# EAGLE board MurataMicroSD_P (EAGLE 6.5.0)
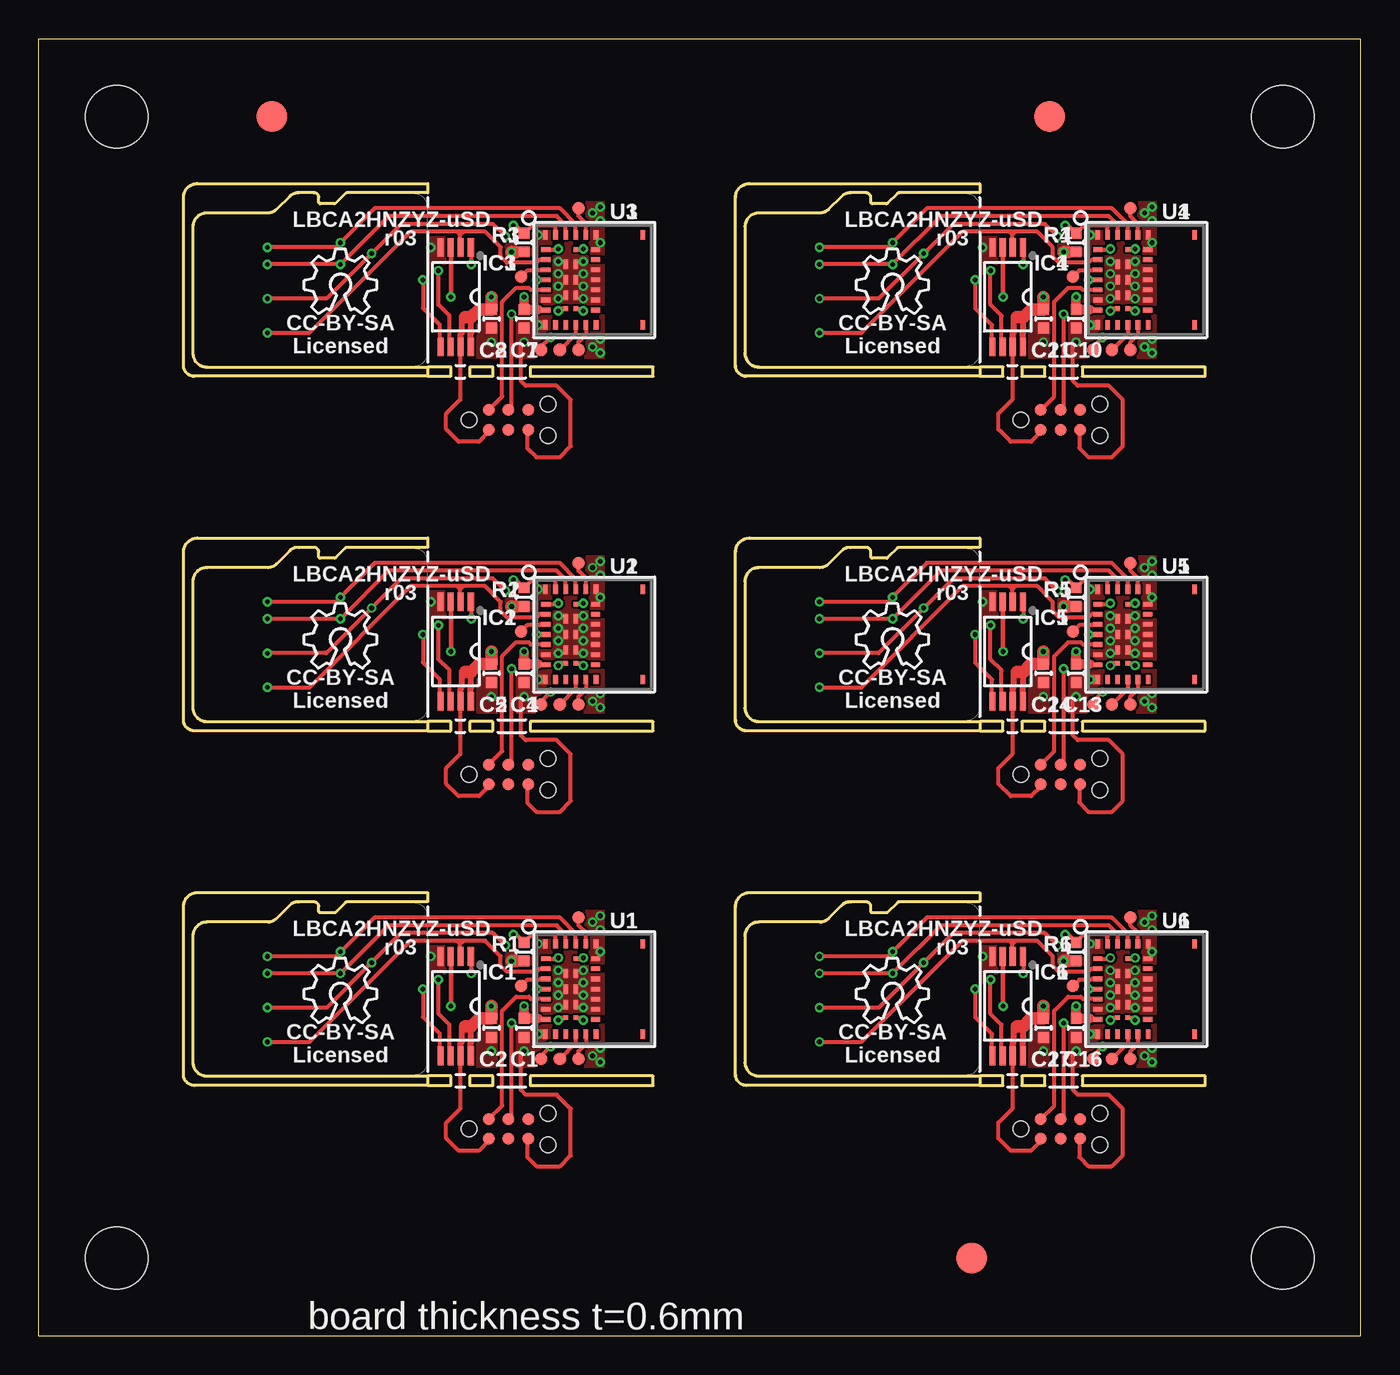
[diagram p0: board, top side]
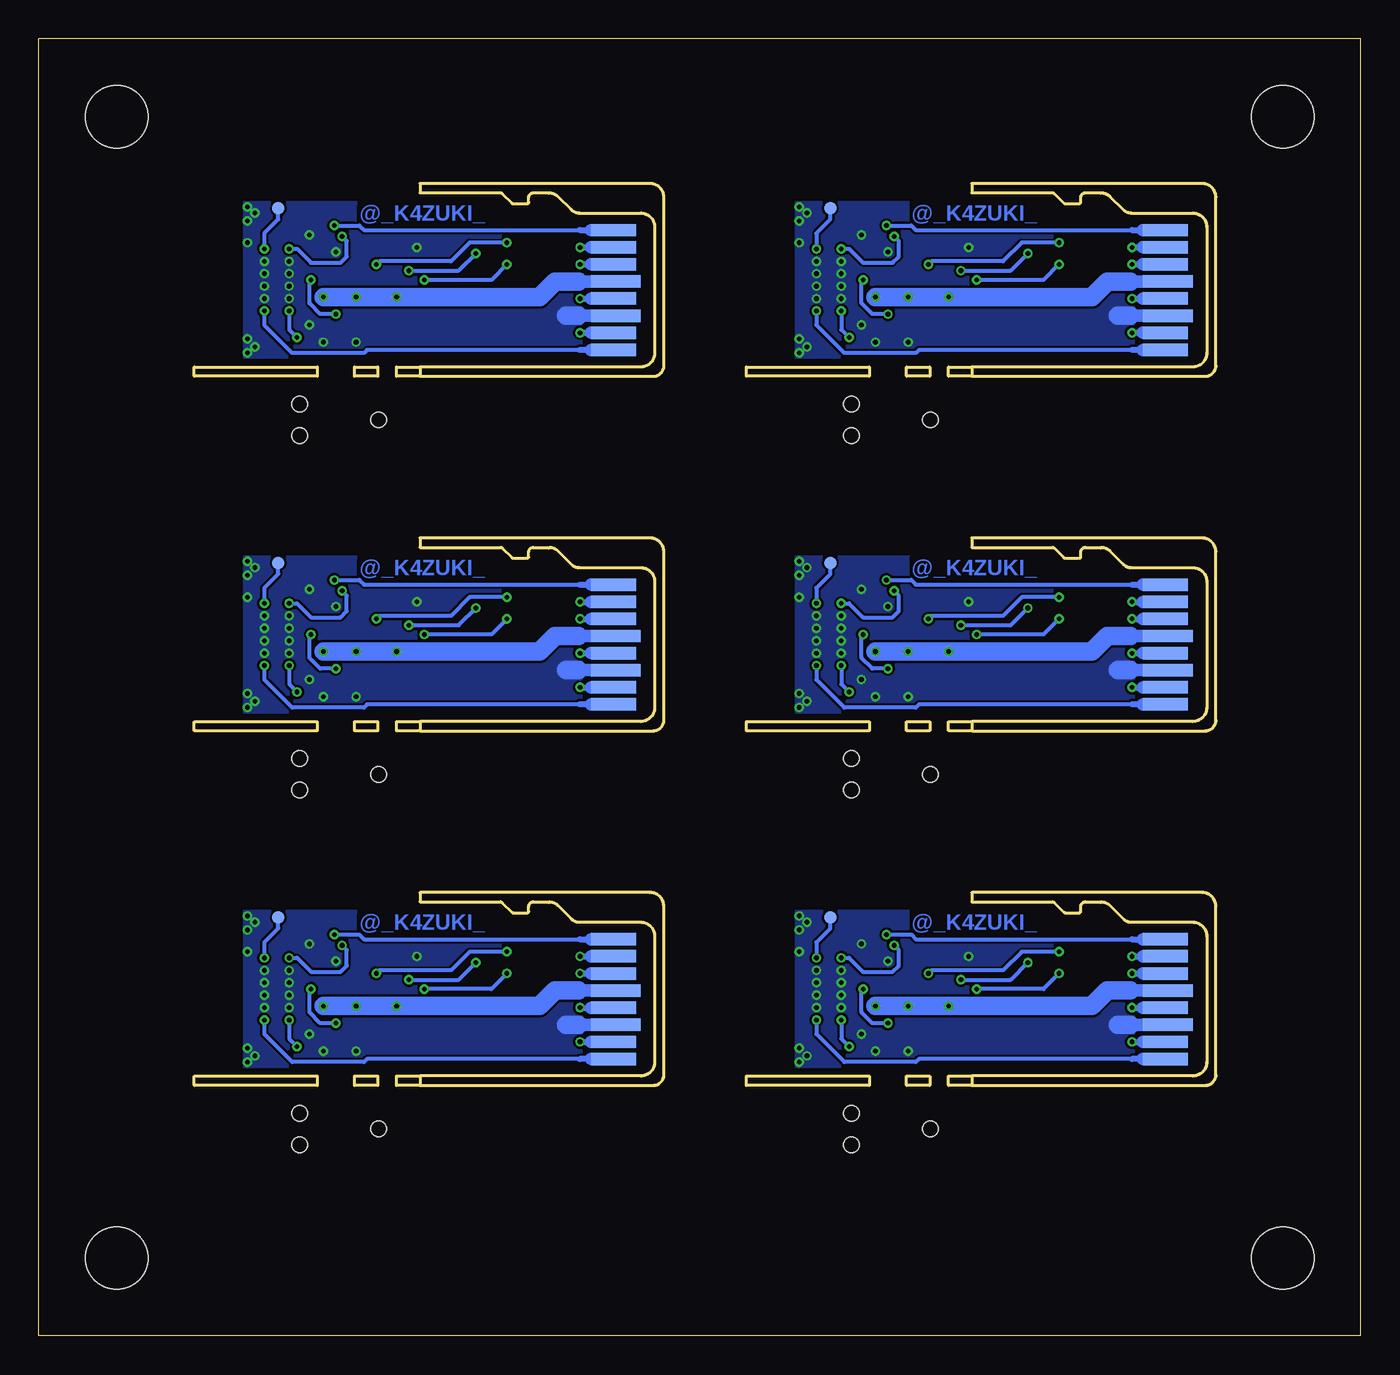
[diagram p1: board, bottom side, seen from below]

Size 85 x 83.4 mm. Coordinates in mm from the lower left corner, seen from the top.
Outline: 0,0 85,0 85,83.4 0,83.4 0,0
Copper layers (1*16): Top 0.0356mm / dielectric 1.5011mm / Bottom 0.0356mm
Design rules "SilverCircuits.2 *": minimum track width 0.15mm, minimum drill 0.3mm, track to track 0.15mm, track to pad 0.15mm, pad to pad 0.15mm, via to via 0.15mm, smd to smd 0mil, copper to edge 0.4mm, drill to drill 0.15mm, minimum pad ring 10mil, minimum via ring 0.15mm, stop-mask expansion 4mil, vias tented up to drill 100mil, thermal gap 10mil
Holes 4 mm at 5,5 80,5 5,78.4 80,78.4
tRestrict: area 36.4,16.8 to 39.5,27.8; area 36.4,39.6 to 39.5,50.6; area 36.4,62.4 to 39.5,73.4; area 71.9,62.4 to 75,73.4; area 71.9,39.6 to 75,50.6; area 71.9,16.8 to 75,27.8; 48 lines
bRestrict: area 36.4,16.8 to 39.5,27.8; area 10,16.8 to 14.5,27.8; area 36.4,39.6 to 39.5,50.6; area 10,39.6 to 14.5,50.6; area 36.4,62.4 to 39.5,73.4; area 10,62.4 to 14.5,73.4; area 71.9,62.4 to 75,73.4; area 45.5,62.4 to 50,73.4; area 71.9,39.6 to 75,50.6; area 45.5,39.6 to 50,50.6; area 71.9,16.8 to 75,27.8; area 45.5,16.8 to 50,27.8; 12 lines
Milling: area 25,16.1 to 26.5,16.7; area 27.7,16.1 to 29.2,16.7; area 31.6,16.1 to 39.5,16.7; area 25,38.9 to 26.5,39.5; area 27.7,38.9 to 29.2,39.5; area 31.6,38.9 to 39.5,39.5; area 25,61.7 to 26.5,62.3; area 27.7,61.7 to 29.2,62.3; area 31.6,61.7 to 39.5,62.3; area 60.5,61.7 to 62,62.3; area 63.2,61.7 to 64.7,62.3; area 67.1,61.7 to 75,62.3; 6 more areas

## Footprints (pad centres in the part's own frame; a part is rotated, then mirrored left to right if it is on the bottom)
C0402 = smd 0.7 x 0.7: 1 -0.6,0; 2 0.6,0
BOARD_MICROSD = smd 2.9 x 0.8: 1_DAT2 2.55,2.3; 2_CS 2.55,3.4; 3_MOSI 2.55,4.5; 5_CLK 2.55,6.7; 7_MISO 2.55,8.9; 8_DAT1 2.55,10 | smd 3.2 x 0.8: 4_VDD 2.4,5.6; 6_VSS 2.4,7.8
CON_TC2030-IDC-NL = smd 0.787 x 0.787: 1 -1.27,-0.635; 2 -1.27,0.635; 3 0,-0.635; 4 0,0.635; 5 1.27,-0.635; 6 1.27,0.635 | hole 0.991: -2.54,0; 2.54,1.016; 2.54,-1.016
IC_08_0.65_160MIL = smd 0.4 x 1.2: 1 -0.975,-3.2; 2 -0.325,-3.2; 3 0.325,-3.2; 4 0.975,-3.2; 5 0.975,3.2; 6 0.325,3.2; 7 -0.325,3.2; 8 -0.975,3.2
TP08R = smd 0.8 x 0.8: TP 0,0
TP20R = smd 2 x 2: TP 0,0
IC_MURATA_LBCA2HNZYZ-711 = smd 0.3 x 0.6: 1 1.55,0.6; 2 2.2,0.6; 3 2.85,0.6; 4 3.5,0.6; 5 4.15,0.6; 6 4.8,0.6; 7 5.45,0.6; 14 5.45,3.8; 15 4.8,3.8; 16 4.15,3.8; 17 3.5,3.8; 18 2.85,3.8; 19 2.2,3.8; 20 1.55,3.8 | smd 0.6 x 0.3: 8 6.4,0.575; 9 6.4,1.225; 10 6.4,1.875; 11 6.4,2.525; 12 6.4,3.175; 13 6.4,3.825; 21 0.6,3.825; 22 0.6,3.175; 23 0.6,2.525; 24 0.6,1.875; 25 0.6,1.225; 26 0.6,0.575; 27 2.5,1.875; 28 3.5,1.875; 29 4.5,1.875; 32 4.5,2.525; 33 3.5,2.525; 34 2.5,2.525; 36 6.4,6.825; 37 0.6,6.825 | smd 0.3 x 0.3: 30 5.35,1.875; 31 5.35,2.525; 35 1.55,2.525

## Placement (x,y rotation side)
C1  [C0402]  31.2,19.8 270 top
C2  [C0402]  29.1,19.8 270 top
C3  BOARD_MICROSD  [BOARD_MICROSD]  10,50.6 180 bottom
C4  [C0402]  31.2,42.6 270 top
C5  [C0402]  29.1,42.6 270 top
C6  BOARD_MICROSD  [BOARD_MICROSD]  10,73.4 180 bottom
C7  [C0402]  31.2,65.4 270 top
C8  [C0402]  29.1,65.4 270 top
C9  BOARD_MICROSD  [BOARD_MICROSD]  45.5,73.4 180 bottom
C10  [C0402]  66.7,65.4 270 top
C11  [C0402]  64.6,65.4 270 top
C12  BOARD_MICROSD  [BOARD_MICROSD]  45.5,50.6 180 bottom
C13  [C0402]  66.7,42.6 270 top
C14  [C0402]  64.6,42.6 270 top
C15  BOARD_MICROSD  [BOARD_MICROSD]  45.5,27.8 180 bottom
C16  [C0402]  66.7,19.8 270 top
C17  [C0402]  64.6,19.8 270 top
C100  BOARD_MICROSD  [BOARD_MICROSD]  10,27.8 180 bottom
CON1  CON_TC2030-CTL-NL  [CON_TC2030-IDC-NL]  30.2,13.3 0 top
CON2  CON_TC2030-CTL-NL  [CON_TC2030-IDC-NL]  30.2,36.1 0 top
CON3  CON_TC2030-CTL-NL  [CON_TC2030-IDC-NL]  30.2,58.9 0 top
CON4  CON_TC2030-CTL-NL  [CON_TC2030-IDC-NL]  65.7,58.9 0 top
CON5  CON_TC2030-CTL-NL  [CON_TC2030-IDC-NL]  65.7,36.1 0 top
CON6  CON_TC2030-CTL-NL  [CON_TC2030-IDC-NL]  65.7,13.3 0 top
IC1  1265-1139-1-ND  [IC_08_0.65_160MIL]  26.8,21.2 180 top
IC2  1265-1139-1-ND  [IC_08_0.65_160MIL]  26.8,44 180 top
IC3  1265-1139-1-ND  [IC_08_0.65_160MIL]  26.8,66.8 180 top
IC4  1265-1139-1-ND  [IC_08_0.65_160MIL]  62.3,66.8 180 top
IC5  1265-1139-1-ND  [IC_08_0.65_160MIL]  62.3,44 180 top
IC6  1265-1139-1-ND  [IC_08_0.65_160MIL]  62.3,21.2 180 top
R1  [C0402]  31.2,24.7 90 top
R2  [C0402]  31.2,47.5 90 top
R3  [C0402]  31.2,70.3 90 top
R4  [C0402]  66.7,70.3 90 top
R5  [C0402]  66.7,47.5 90 top
R6  [C0402]  66.7,24.7 90 top
TP1  TPTP08R  [TP08R]  31,22.5 0 top
TP2  TPTP08R  [TP08R]  33.5,40.6 0 top
TP3  TPTP08R  [TP08R]  34.7,40.6 0 top
TP4  TPTP08R  [TP08R]  34.7,49.7 0 top
TP5  TPTP08R  [TP08R]  34.1,49.7 0 bottom
TP6  TPTP08R  [TP08R]  32.3,40.6 0 top
TP7  TPTP08R  [TP08R]  33.5,17.8 0 top
TP8  TPTP08R  [TP08R]  34.7,17.8 0 top
TP9  TPTP08R  [TP08R]  34.7,26.9 0 top
TP10  TPTP08R  [TP08R]  34.1,26.9 0 bottom
TP11  TPTP08R  [TP08R]  32.3,17.8 0 top
TP12  TPTP08R  [TP08R]  31,45.3 0 top
TP13  TPTP08R  [TP08R]  33.5,63.4 0 top
TP14  TPTP08R  [TP08R]  34.7,63.4 0 top
TP15  TPTP08R  [TP08R]  34.7,72.5 0 top
TP16  TPTP08R  [TP08R]  34.1,72.5 0 bottom
TP17  TPTP08R  [TP08R]  32.3,63.4 0 top
TP18  TPTP08R  [TP08R]  31,68.1 0 top
TP19  TPTP08R  [TP08R]  69,63.4 0 top
TP20  TPTP08R  [TP08R]  70.2,63.4 0 top
TP21  TPTP08R  [TP08R]  70.2,72.5 0 top
TP22  TPTP08R  [TP08R]  69.6,72.5 0 bottom
TP23  TPTP08R  [TP08R]  67.8,63.4 0 top
TP24  TPTP08R  [TP08R]  66.5,68.1 0 top
TP25  TPTP08R  [TP08R]  69,40.6 0 top
TP26  TPTP08R  [TP08R]  70.2,40.6 0 top
TP27  TPTP08R  [TP08R]  70.2,49.7 0 top
TP28  TPTP08R  [TP08R]  69.6,49.7 0 bottom
TP29  TPTP08R  [TP08R]  67.8,40.6 0 top
TP30  TPTP08R  [TP08R]  66.5,45.3 0 top
TP31  TPTP08R  [TP08R]  69,17.8 0 top
TP32  TPTP08R  [TP08R]  70.2,17.8 0 top
TP33  TPTP08R  [TP08R]  70.2,26.9 0 top
TP34  TPTP08R  [TP08R]  69.6,26.9 0 bottom
TP35  TPTP08R  [TP08R]  67.8,17.8 0 top
TP36  TPTP08R  [TP08R]  66.5,22.5 0 top
TP100  TPTP20R  [TP20R]  15,78.4 0 top
TP101  TPTP20R  [TP20R]  60,5 0 top
TP102  TPTP20R  [TP20R]  65,78.4 0 top
U1  IC_BLE_LBCA2HNZYZ-711  [IC_MURATA_LBCA2HNZYZ-711]  32,25.8 270 top
U2  IC_BLE_LBCA2HNZYZ-711  [IC_MURATA_LBCA2HNZYZ-711]  32,48.6 270 top
U3  IC_BLE_LBCA2HNZYZ-711  [IC_MURATA_LBCA2HNZYZ-711]  32,71.4 270 top
U4  IC_BLE_LBCA2HNZYZ-711  [IC_MURATA_LBCA2HNZYZ-711]  67.5,71.4 270 top
U5  IC_BLE_LBCA2HNZYZ-711  [IC_MURATA_LBCA2HNZYZ-711]  67.5,48.6 270 top
U6  IC_BLE_LBCA2HNZYZ-711  [IC_MURATA_LBCA2HNZYZ-711]  67.5,25.8 270 top
U$1  ICON_OSHW  [ICON_OSHW]  19.4,22 0 top
U$2  ICON_OSHW  [ICON_OSHW]  19.4,44.8 0 top
U$3  ICON_OSHW  [ICON_OSHW]  19.4,67.6 0 top
U$4  ICON_OSHW  [ICON_OSHW]  54.9,67.6 0 top
U$5  ICON_OSHW  [ICON_OSHW]  54.9,44.8 0 top
U$6  ICON_OSHW  [ICON_OSHW]  54.9,22 0 top

## Library data of the parts
C1-C17 C100 CON1-CON6 IC1-IC6 R1-R6 U1-U6 U$1-U$6 = mylib
TP1-TP36 TP100-TP102 = testpad_local

## Nets
3.3V: C1.1 C2.1 C100.4_VDD CON1.1 IC1.3 IC1.7 IC1.8 U1.7
3.3V1: C3.4_VDD C4.1 C5.1 CON2.1 IC2.3 IC2.7 IC2.8 U2.7
3.3V2: C6.4_VDD C7.1 C8.1 CON3.1 IC3.3 IC3.7 IC3.8 U3.7
3.3V3: C9.4_VDD C10.1 C11.1 CON4.1 IC4.3 IC4.7 IC4.8 U4.7
3.3V4: C12.4_VDD C13.1 C14.1 CON5.1 IC5.3 IC5.7 IC5.8 U5.7
3.3V5: C15.4_VDD C16.1 C17.1 CON6.1 IC6.3 IC6.7 IC6.8 U6.7
!CS!: C100.2_CS IC1.1 U1.23
!CS!1: C3.2_CS IC2.1 U2.23
!CS!2: C6.2_CS IC3.1 U3.23
!CS!3: C9.2_CS IC4.1 U4.23
!CS!4: C12.2_CS IC5.1 U5.23
!CS!5: C15.2_CS IC6.1 U6.23
GND: C1.2 C2.2 C100.6_VSS CON1.5 IC1.4 R1.1 U1.6 U1.8 U1.15 U1.16 U1.17 U1.18 U1.20 U1.21 U1.26 U1.27 U1.28 U1.29 U1.32 U1.33 U1.34
GND1: C3.6_VSS C4.2 C5.2 CON2.5 IC2.4 R2.1 U2.6 U2.8 U2.15 U2.16 U2.17 U2.18 U2.20 U2.21 U2.26 U2.27 U2.28 U2.29 U2.32 U2.33 U2.34
GND2: C6.6_VSS C7.2 C8.2 CON3.5 IC3.4 R3.1 U3.6 U3.8 U3.15 U3.16 U3.17 U3.18 U3.20 U3.21 U3.26 U3.27 U3.28 U3.29 U3.32 U3.33 U3.34
GND3: C9.6_VSS C10.2 C11.2 CON4.5 IC4.4 R4.1 U4.6 U4.8 U4.15 U4.16 U4.17 U4.18 U4.20 U4.21 U4.26 U4.27 U4.28 U4.29 U4.32 U4.33 U4.34
GND4: C12.6_VSS C13.2 C14.2 CON5.5 IC5.4 R5.1 U5.6 U5.8 U5.15 U5.16 U5.17 U5.18 U5.20 U5.21 U5.26 U5.27 U5.28 U5.29 U5.32 U5.33 U5.34
GND5: C15.6_VSS C16.2 C17.2 CON6.5 IC6.4 R6.1 U6.6 U6.8 U6.15 U6.16 U6.17 U6.18 U6.20 U6.21 U6.26 U6.27 U6.28 U6.29 U6.32 U6.33 U6.34
MISO: C100.7_MISO IC1.2 U1.2
MISO1: C3.7_MISO IC2.2 U2.2
MISO2: C6.7_MISO IC3.2 U3.2
MISO3: C9.7_MISO IC4.2 U4.2
MISO4: C12.7_MISO IC5.2 U5.2
MISO5: C15.7_MISO IC6.2 U6.2
N$1: C100.1_DAT2 R1.2 U1.25
N$2: C3.1_DAT2 R2.2 U2.25
N$3: C6.1_DAT2 R3.2 U3.25
N$4: C9.1_DAT2 R4.2 U4.25
N$5: C12.1_DAT2 R5.2 U5.25
N$6: C15.1_DAT2 R6.2 U6.25
P0_1: TP9.TP U1.22
P0_2: TP8.TP U1.12
P0_3: TP7.TP U1.11
P0_4: TP12.TP U2.3
P0_5: TP2.TP U2.11
P0_6: TP1.TP U1.3
P0_7: TP3.TP U2.12
P0_8: TP4.TP U2.22
P0_9: TP18.TP U3.3
P0_10: TP13.TP U3.11
P0_11: TP14.TP U3.12
P0_12: TP15.TP U3.22
P0_13: TP24.TP U4.3
P0_14: TP19.TP U4.11
P0_15: TP20.TP U4.12
P0_16: TP21.TP U4.22
P0_17: TP30.TP U5.3
P0_18: TP25.TP U5.11
P0_19: TP26.TP U5.12
P0_20: TP27.TP U5.22
P0_21: TP36.TP U6.3
P0_22: TP31.TP U6.11
P0_23: TP32.TP U6.12
P0_24: TP33.TP U6.22
P1_0: TP10.TP U1.35
P1_1: TP11.TP U1.30
P1_2: TP5.TP U2.35
P1_3: TP6.TP U2.30
P1_4: TP16.TP U3.35
P1_5: TP17.TP U3.30
P1_6: TP22.TP U4.35
P1_7: TP23.TP U4.30
P1_8: TP28.TP U5.35
P1_9: TP29.TP U5.30
P1_10: TP34.TP U6.35
P1_11: TP35.TP U6.30
RXD_MOSI: C100.3_MOSI IC1.5 U1.24
RXD_MOSI1: C3.3_MOSI IC2.5 U2.24
RXD_MOSI2: C6.3_MOSI IC3.5 U3.24
RXD_MOSI3: C9.3_MOSI IC4.5 U4.24
RXD_MOSI4: C12.3_MOSI IC5.5 U5.24
RXD_MOSI5: C15.3_MOSI IC6.5 U6.24
SCK: C100.5_CLK IC1.6 U1.1
SCK1: C3.5_CLK IC2.6 U2.1
SCK2: C6.5_CLK IC3.6 U3.1
SCK3: C9.5_CLK IC4.6 U4.1
SCK4: C12.5_CLK IC5.6 U5.1
SCK5: C15.5_CLK IC6.6 U6.1
SWCLK: CON1.4 U1.4
SWCLK1: CON2.4 U2.4
SWCLK2: CON3.4 U3.4
SWCLK3: CON4.4 U4.4
SWCLK4: CON5.4 U5.4
SWCLK5: CON6.4 U6.4
SWDIO: CON1.2 U1.5
SWDIO1: CON2.2 U2.5
SWDIO2: CON3.2 U3.5
SWDIO3: CON4.2 U4.5
SWDIO4: CON5.2 U5.5
SWDIO5: CON6.2 U6.5
VPP: C100.8_DAT1 U1.31
VPP1: C3.8_DAT1 U2.31
VPP2: C6.8_DAT1 U3.31
VPP3: C9.8_DAT1 U4.31
VPP4: C12.8_DAT1 U5.31
VPP5: C15.8_DAT1 U6.31

## Tracks (layer width: path | path; a pad name or v marks a point on that pad's centre or on a via)
3.3V  (via drill 0.3)
  Top 0.25: CON1.1 28.93,12.53 28.3,11.9 27,11.9 26.2,12.7 26.2,13.7 27.1,14.6 27.1,18 IC1.7
  Top 0.3: U1.7 32.15,20.35 32.1,20.4 | IC1.3 26.48,24.32 26.5,24.3 v26.5,21.2
  Top 0.4: IC1.7 27.12,18.82 27.2,18.9 27.2,19.9 27.4,19.9 | IC1.8 27.77,18.88 27.8,18.9 27.8,19.9
  Top 0.6: v31.2,21.2 C1.1 32.1,20.4
  Top 0.8: v29.1,21.2 C2.1 28.3,20.4 27.8,19.9 27.4,19.9
  Bottom 0.8: C100.4_VDD 14.8,22.2
  Bottom 1.2: 14.8,22.2 16.3,22.2 17.3,21.2 v26.5,21.2 v29.1,21.2 v31.2,21.2
3.3V1  (via drill 0.3)
  Top 0.25: CON2.1 28.93,35.33 28.3,34.7 27,34.7 26.2,35.5 26.2,36.5 27.1,37.4 27.1,40.8 IC2.7
  Top 0.3: U2.7 32.15,43.15 32.1,43.2 | IC2.3 26.48,47.12 26.5,47.1 v26.5,44
  Top 0.4: IC2.7 27.12,41.62 27.2,41.7 27.2,42.7 27.4,42.7 | IC2.8 27.77,41.67 27.8,41.7 27.8,42.7
  Top 0.6: v31.2,44 C4.1 32.1,43.2
  Top 0.8: v29.1,44 C5.1 28.3,43.2 27.8,42.7 27.4,42.7
  Bottom 0.8: C3.4_VDD 14.8,45
  Bottom 1.2: 14.8,45 16.3,45 17.3,44 v26.5,44 v29.1,44 v31.2,44
3.3V2  (via drill 0.3)
  Top 0.25: CON3.1 28.93,58.13 28.3,57.5 27,57.5 26.2,58.3 26.2,59.3 27.1,60.2 27.1,63.6 IC3.7
  Top 0.3: U3.7 32.15,65.95 32.1,66 | IC3.3 26.48,69.92 26.5,69.9 v26.5,66.8
  Top 0.4: IC3.7 27.12,64.42 27.2,64.5 27.2,65.5 27.4,65.5 | IC3.8 27.77,64.47 27.8,64.5 27.8,65.5
  Top 0.6: v31.2,66.8 C7.1 32.1,66
  Top 0.8: v29.1,66.8 C8.1 28.3,66 27.8,65.5 27.4,65.5
  Bottom 0.8: C6.4_VDD 14.8,67.8
  Bottom 1.2: 14.8,67.8 16.3,67.8 17.3,66.8 v26.5,66.8 v29.1,66.8 v31.2,66.8
3.3V3  (via drill 0.3)
  Top 0.25: CON4.1 64.43,58.13 63.8,57.5 62.5,57.5 61.7,58.3 61.7,59.3 62.6,60.2 62.6,63.6 IC4.7
  Top 0.3: U4.7 67.65,65.95 67.6,66 | IC4.3 61.98,69.92 62,69.9 v62,66.8
  Top 0.4: IC4.7 62.62,64.42 62.7,64.5 62.7,65.5 62.9,65.5 | IC4.8 63.27,64.47 63.3,64.5 63.3,65.5
  Top 0.6: v66.7,66.8 C10.1 67.6,66
  Top 0.8: v64.6,66.8 C11.1 63.8,66 63.3,65.5 62.9,65.5
  Bottom 0.8: C9.4_VDD 50.3,67.8
  Bottom 1.2: 50.3,67.8 51.8,67.8 52.8,66.8 v62,66.8 v64.6,66.8 v66.7,66.8
3.3V4  (via drill 0.3)
  Top 0.25: CON5.1 64.43,35.33 63.8,34.7 62.5,34.7 61.7,35.5 61.7,36.5 62.6,37.4 62.6,40.8 IC5.7
  Top 0.3: U5.7 67.65,43.15 67.6,43.2 | IC5.3 61.98,47.12 62,47.1 v62,44
  Top 0.4: IC5.7 62.62,41.62 62.7,41.7 62.7,42.7 62.9,42.7 | IC5.8 63.27,41.67 63.3,41.7 63.3,42.7
  Top 0.6: v66.7,44 C13.1 67.6,43.2
  Top 0.8: v64.6,44 C14.1 63.8,43.2 63.3,42.7 62.9,42.7
  Bottom 0.8: C12.4_VDD 50.3,45
  Bottom 1.2: 50.3,45 51.8,45 52.8,44 v62,44 v64.6,44 v66.7,44
3.3V5  (via drill 0.3)
  Top 0.25: CON6.1 64.43,12.53 63.8,11.9 62.5,11.9 61.7,12.7 61.7,13.7 62.6,14.6 62.6,18 IC6.7
  Top 0.3: U6.7 67.65,20.35 67.6,20.4 | IC6.3 61.98,24.32 62,24.3 v62,21.2
  Top 0.4: IC6.7 62.62,18.82 62.7,18.9 62.7,19.9 62.9,19.9 | IC6.8 63.27,18.88 63.3,18.9 63.3,19.9
  Top 0.6: v66.7,21.2 C16.1 67.6,20.4
  Top 0.8: v64.6,21.2 C17.1 63.8,20.4 63.3,19.9 62.9,19.9
  Bottom 0.8: C15.4_VDD 50.3,22.2
  Bottom 1.2: 50.3,22.2 51.8,22.2 52.8,21.2 v62,21.2 v64.6,21.2 v66.7,21.2
!CS!  (via drill 0.3)
  Top 0.25: U1.23 34.52,25.88 33.5,26.9 21.6,26.9 v19.4,24.7 19.1,24.4 v14.7,24.4 | IC1.1 27.77,24.32 27.8,24.3 v27.8,23.3
  Bottom 0.25: v19.4,24.7 21.8,24.7 23,23.5 27.6,23.5 v27.8,23.3
  Bottom 0.4: v14.7,24.4 14,24.4
  Bottom 0.8: C100.2_CS 14,24.4
!CS!1  (via drill 0.3)
  Top 0.25: U2.23 34.52,48.67 33.5,49.7 21.6,49.7 v19.4,47.5 19.1,47.2 v14.7,47.2 | IC2.1 27.77,47.12 27.8,47.1 v27.8,46.1
  Bottom 0.25: v19.4,47.5 21.8,47.5 23,46.3 27.6,46.3 v27.8,46.1
  Bottom 0.4: v14.7,47.2 14,47.2
  Bottom 0.8: C3.2_CS 14,47.2
!CS!2  (via drill 0.3)
  Top 0.25: U3.23 34.52,71.47 33.5,72.5 21.6,72.5 v19.4,70.3 19.1,70 v14.7,70 | IC3.1 27.77,69.92 27.8,69.9 v27.8,68.9
  Bottom 0.25: v19.4,70.3 21.8,70.3 23,69.1 27.6,69.1 v27.8,68.9
  Bottom 0.4: v14.7,70 14,70
  Bottom 0.8: C6.2_CS 14,70
!CS!3  (via drill 0.3)
  Top 0.25: U4.23 70.03,71.47 69,72.5 57.1,72.5 v54.9,70.3 54.6,70 v50.2,70 | IC4.1 63.27,69.92 63.3,69.9 v63.3,68.9
  Bottom 0.25: v54.9,70.3 57.3,70.3 58.5,69.1 63.1,69.1 v63.3,68.9
  Bottom 0.4: v50.2,70 49.5,70
  Bottom 0.8: C9.2_CS 49.5,70
!CS!4  (via drill 0.3)
  Top 0.25: U5.23 70.03,48.67 69,49.7 57.1,49.7 v54.9,47.5 54.6,47.2 v50.2,47.2 | IC5.1 63.27,47.12 63.3,47.1 v63.3,46.1
  Bottom 0.25: v54.9,47.5 57.3,47.5 58.5,46.3 63.1,46.3 v63.3,46.1
  Bottom 0.4: v50.2,47.2 49.5,47.2
  Bottom 0.8: C12.2_CS 49.5,47.2
!CS!5  (via drill 0.3)
  Top 0.25: U6.23 70.03,25.88 69,26.9 57.1,26.9 v54.9,24.7 54.6,24.4 v50.2,24.4 | IC6.1 63.27,24.32 63.3,24.3 v63.3,23.3
  Bottom 0.25: v54.9,24.7 57.3,24.7 58.5,23.5 63.1,23.5 v63.3,23.3
  Bottom 0.4: v50.2,24.4 49.5,24.4
  Bottom 0.8: C15.2_CS 49.5,24.4
GND  (via drill 0.3, 0.3 pad 0.6)
  Top 0.25: CON1.5 31.4,12.6 31.4,11.5 32,10.9 33.5,10.9 34.2,11.6 34.2,14.6 33.3,15.5 31.3,15.5 31,15.8 31,18.3 v31.2,18.3
  Top 0.6: 30.7,24.1 R1.1 | v32.1,19.4 32.4,19.4
  Top 0.8: v30.4,24.1 30.7,24.1
  Bottom 0.8: C100.6_VSS 14.8,20
  Bottom 1.2: 15.6,20 14.8,20
  other vias: 33.4,21.1 33.4,23.5 35,23.5 35,22.7 35,21.9 35,21.1 32.1,25.2 36.1,27 35.6,26.6 36.1,26.1 36.1,24.7 36.1,18.5 35.6,18 36.1,17.6 33.4,22.7 33.4,21.9 25.2,24.4 29.1,18.3
  pour Bottom: 10,27.8 39.5,27.8 39.5,16.8 10,16.8
  pour Top (no thermals): 25.1,27.8 39.5,27.8 39.5,16.8 25.1,16.8
GND1  (via drill 0.3, 0.3 pad 0.6)
  Top 0.25: CON2.5 31.4,35.4 31.4,34.3 32,33.7 33.5,33.7 34.2,34.4 34.2,37.4 33.3,38.3 31.3,38.3 31,38.6 31,41.1 v31.2,41.1
  Top 0.6: 30.7,46.9 R2.1 | v32.1,42.2 32.4,42.2
  Top 0.8: v30.4,46.9 30.7,46.9
  Bottom 0.8: C3.6_VSS 14.8,42.8
  Bottom 1.2: 15.6,42.8 14.8,42.8
  other vias: 33.4,43.9 33.4,46.3 35,46.3 35,45.5 35,44.7 35,43.9 32.1,48 36.1,49.8 35.6,49.4 36.1,48.9 36.1,47.5 36.1,41.3 35.6,40.8 36.1,40.4 33.4,45.5 33.4,44.7 25.2,47.2 29.1,41.1
  pour Bottom: 10,50.6 39.5,50.6 39.5,39.6 10,39.6
  pour Top (no thermals): 25.1,50.6 39.5,50.6 39.5,39.6 25.1,39.6
GND2  (via drill 0.3, 0.3 pad 0.6)
  Top 0.25: CON3.5 31.4,58.2 31.4,57.1 32,56.5 33.5,56.5 34.2,57.2 34.2,60.2 33.3,61.1 31.3,61.1 31,61.4 31,63.9 v31.2,63.9
  Top 0.6: 30.7,69.7 R3.1 | v32.1,65 32.4,65
  Top 0.8: v30.4,69.7 30.7,69.7
  Bottom 0.8: C6.6_VSS 14.8,65.6
  Bottom 1.2: 15.6,65.6 14.8,65.6
  other vias: 33.4,66.7 33.4,69.1 35,69.1 35,68.3 35,67.5 35,66.7 32.1,70.8 36.1,72.6 35.6,72.2 36.1,71.7 36.1,70.3 36.1,64.1 35.6,63.6 36.1,63.2 33.4,68.3 33.4,67.5 25.2,70 29.1,63.9
  pour Bottom: 10,73.4 39.5,73.4 39.5,62.4 10,62.4
  pour Top (no thermals): 25.1,73.4 39.5,73.4 39.5,62.4 25.1,62.4
GND3  (via drill 0.3, 0.3 pad 0.6)
  Top 0.25: CON4.5 66.9,58.2 66.9,57.1 67.5,56.5 69,56.5 69.7,57.2 69.7,60.2 68.8,61.1 66.8,61.1 66.5,61.4 66.5,63.9 v66.7,63.9
  Top 0.6: 66.2,69.7 R4.1 | v67.6,65 67.9,65
  Top 0.8: v65.9,69.7 66.2,69.7
  Bottom 0.8: C9.6_VSS 50.3,65.6
  Bottom 1.2: 51.1,65.6 50.3,65.6
  other vias: 68.9,66.7 68.9,69.1 70.5,69.1 70.5,68.3 70.5,67.5 70.5,66.7 67.6,70.8 71.6,72.6 71.1,72.2 71.6,71.7 71.6,70.3 71.6,64.1 71.1,63.6 71.6,63.2 68.9,68.3 68.9,67.5 60.7,70 64.6,63.9
  pour Bottom: 45.5,73.4 75,73.4 75,62.4 45.5,62.4
  pour Top (no thermals): 60.6,73.4 75,73.4 75,62.4 60.6,62.4
GND4  (via drill 0.3, 0.3 pad 0.6)
  Top 0.25: CON5.5 66.9,35.4 66.9,34.3 67.5,33.7 69,33.7 69.7,34.4 69.7,37.4 68.8,38.3 66.8,38.3 66.5,38.6 66.5,41.1 v66.7,41.1
  Top 0.6: 66.2,46.9 R5.1 | v67.6,42.2 67.9,42.2
  Top 0.8: v65.9,46.9 66.2,46.9
  Bottom 0.8: C12.6_VSS 50.3,42.8
  Bottom 1.2: 51.1,42.8 50.3,42.8
  other vias: 68.9,43.9 68.9,46.3 70.5,46.3 70.5,45.5 70.5,44.7 70.5,43.9 67.6,48 71.6,49.8 71.1,49.4 71.6,48.9 71.6,47.5 71.6,41.3 71.1,40.8 71.6,40.4 68.9,45.5 68.9,44.7 60.7,47.2 64.6,41.1
  pour Bottom: 45.5,50.6 75,50.6 75,39.6 45.5,39.6
  pour Top (no thermals): 60.6,50.6 75,50.6 75,39.6 60.6,39.6
GND5  (via drill 0.3, 0.3 pad 0.6)
  Top 0.25: CON6.5 66.9,12.6 66.9,11.5 67.5,10.9 69,10.9 69.7,11.6 69.7,14.6 68.8,15.5 66.8,15.5 66.5,15.8 66.5,18.3 v66.7,18.3
  Top 0.6: 66.2,24.1 R6.1 | v67.6,19.4 67.9,19.4
  Top 0.8: v65.9,24.1 66.2,24.1
  Bottom 0.8: C15.6_VSS 50.3,20
  Bottom 1.2: 51.1,20 50.3,20
  other vias: 68.9,21.1 68.9,23.5 70.5,23.5 70.5,22.7 70.5,21.9 70.5,21.1 67.6,25.2 71.6,27 71.1,26.6 71.6,26.1 71.6,24.7 71.6,18.5 71.1,18 71.6,17.6 68.9,22.7 68.9,21.9 60.7,24.4 64.6,18.3
  pour Bottom: 45.5,27.8 75,27.8 75,16.8 45.5,16.8
  pour Top (no thermals): 60.6,27.8 75,27.8 75,16.8 60.6,16.8
MISO  (via drill 0.3)
  Top 0.25: U1.2 32.2,23.6 32,23.4 30.1,23.4 29.7,23.8 29.7,24.4 28.7,25.4 27.3,25.4 | 27.3,25.4 27.1,25.4 | 27.1,25.4 26.9,25.4 | 26.9,25.4 23.9,25.4 17.4,18.9 v14.7,18.9 | IC1.2 27.12,24.77 27.1,24.8 27.1,25.2 | 27.1,25.2 27.1,25.4 | 26.9,25.4 27.1,25.2 | 27.1,25.2 27.3,25.4
  Bottom 0.4: v14.7,18.9 14,18.9
  Bottom 0.8: C100.7_MISO 14,18.9
MISO1  (via drill 0.3)
  Top 0.25: U2.2 32.2,46.4 32,46.2 30.1,46.2 29.7,46.6 29.7,47.2 28.7,48.2 27.3,48.2 | 27.3,48.2 27.1,48.2 | 27.1,48.2 26.9,48.2 | 26.9,48.2 23.9,48.2 17.4,41.7 v14.7,41.7 | IC2.2 27.12,47.58 27.1,47.6 27.1,48 | 27.1,48 27.1,48.2 | 26.9,48.2 27.1,48 | 27.1,48 27.3,48.2
  Bottom 0.4: v14.7,41.7 14,41.7
  Bottom 0.8: C3.7_MISO 14,41.7
MISO2  (via drill 0.3)
  Top 0.25: U3.2 32.2,69.2 32,69 30.1,69 29.7,69.4 29.7,70 28.7,71 27.3,71 | 27.3,71 27.1,71 | 27.1,71 26.9,71 | 26.9,71 23.9,71 17.4,64.5 v14.7,64.5 | IC3.2 27.12,70.38 27.1,70.4 27.1,70.8 | 27.1,70.8 27.1,71 | 26.9,71 27.1,70.8 | 27.1,70.8 27.3,71
  Bottom 0.4: v14.7,64.5 14,64.5
  Bottom 0.8: C6.7_MISO 14,64.5
MISO3  (via drill 0.3)
  Top 0.25: U4.2 67.7,69.2 67.5,69 65.6,69 65.2,69.4 65.2,70 64.2,71 62.8,71 | 62.8,71 62.6,71 | 62.6,71 62.4,71 | 62.4,71 59.4,71 52.9,64.5 v50.2,64.5 | IC4.2 62.62,70.38 62.6,70.4 62.6,70.8 | 62.6,70.8 62.6,71 | 62.4,71 62.6,70.8 | 62.6,70.8 62.8,71
  Bottom 0.4: v50.2,64.5 49.5,64.5
  Bottom 0.8: C9.7_MISO 49.5,64.5
MISO4  (via drill 0.3)
  Top 0.25: U5.2 67.7,46.4 67.5,46.2 65.6,46.2 65.2,46.6 65.2,47.2 64.2,48.2 62.8,48.2 | 62.8,48.2 62.6,48.2 | 62.6,48.2 62.4,48.2 | 62.4,48.2 59.4,48.2 52.9,41.7 v50.2,41.7 | IC5.2 62.62,47.58 62.6,47.6 62.6,48 | 62.6,48 62.6,48.2 | 62.4,48.2 62.6,48 | 62.6,48 62.8,48.2
  Bottom 0.4: v50.2,41.7 49.5,41.7
  Bottom 0.8: C12.7_MISO 49.5,41.7
MISO5  (via drill 0.3)
  Top 0.25: U6.2 67.7,23.6 67.5,23.4 65.6,23.4 65.2,23.8 65.2,24.4 64.2,25.4 62.8,25.4 | 62.8,25.4 62.6,25.4 | 62.6,25.4 62.4,25.4 | 62.4,25.4 59.4,25.4 52.9,18.9 v50.2,18.9 | IC6.2 62.62,24.77 62.6,24.8 62.6,25.2 | 62.6,25.2 62.6,25.4 | 62.4,25.4 62.6,25.2 | 62.6,25.2 62.8,25.4
  Bottom 0.4: v50.2,18.9 49.5,18.9
  Bottom 0.8: C15.7_MISO 49.5,18.9
N$1  (via drill 0.3)
  Top 0.25: U1.25 33.23,25.68 33.1,25.8 31.7,25.8 R1.2 30.7,25.8 v30.5,25.8
  Bottom 0.25: v30.5,25.8 28.9,25.8 28.6,25.5 14.7,25.5
  Bottom 0.4: 14.7,25.5 14,25.5
  Bottom 0.8: 14,25.5 C100.1_DAT2
N$2  (via drill 0.3)
  Top 0.25: U2.25 33.23,48.48 33.1,48.6 31.7,48.6 R2.2 30.7,48.6 v30.5,48.6
  Bottom 0.25: v30.5,48.6 28.9,48.6 28.6,48.3 14.7,48.3
  Bottom 0.4: 14.7,48.3 14,48.3
  Bottom 0.8: 14,48.3 C3.1_DAT2
N$3  (via drill 0.3)
  Top 0.25: U3.25 33.23,71.28 33.1,71.4 31.7,71.4 R3.2 30.7,71.4 v30.5,71.4
  Bottom 0.25: v30.5,71.4 28.9,71.4 28.6,71.1 14.7,71.1
  Bottom 0.4: 14.7,71.1 14,71.1
  Bottom 0.8: 14,71.1 C6.1_DAT2
N$4  (via drill 0.3)
  Top 0.25: U4.25 68.72,71.28 68.6,71.4 67.2,71.4 R4.2 66.2,71.4 v66,71.4
  Bottom 0.25: v66,71.4 64.4,71.4 64.1,71.1 50.2,71.1
  Bottom 0.4: 50.2,71.1 49.5,71.1
  Bottom 0.8: 49.5,71.1 C9.1_DAT2
N$5  (via drill 0.3)
  Top 0.25: U5.25 68.72,48.48 68.6,48.6 67.2,48.6 R5.2 66.2,48.6 v66,48.6
  Bottom 0.25: v66,48.6 64.4,48.6 64.1,48.3 50.2,48.3
  Bottom 0.4: 50.2,48.3 49.5,48.3
  Bottom 0.8: 49.5,48.3 C12.1_DAT2
N$6  (via drill 0.3)
  Top 0.25: U6.25 68.72,25.68 68.6,25.8 67.2,25.8 R6.2 66.2,25.8 v66,25.8
  Bottom 0.25: v66,25.8 64.4,25.8 64.1,25.5 50.2,25.5
  Bottom 0.4: 50.2,25.5 49.5,25.5
  Bottom 0.8: 49.5,25.5 C15.1_DAT2
P0_1
  Top 0.25: U1.22 35.17,25.93 34.7,26.4 TP9.TP
P0_2
  Top 0.25: TP8.TP 34.7,18.3 35.17,18.77 U1.12
P0_3
  Top 0.25: U1.11 34.52,18.82 TP7.TP
P0_4
  Top 0.25: U2.3 32.25,45.75 32.2,45.7 31.4,45.7 TP12.TP
P0_5
  Top 0.25: U2.11 34.52,41.62 TP2.TP
P0_6
  Top 0.25: U1.3 32.25,22.95 32.2,22.9 31.4,22.9 TP1.TP
P0_7
  Top 0.25: TP3.TP 34.7,41.1 35.17,41.58 U2.12
P0_8
  Top 0.25: U2.22 35.17,48.73 34.7,49.2 TP4.TP
P0_9
  Top 0.25: U3.3 32.25,68.55 32.2,68.5 31.4,68.5 TP18.TP
P0_10
  Top 0.25: U3.11 34.52,64.42 TP13.TP
P0_11
  Top 0.25: TP14.TP 34.7,63.9 35.17,64.38 U3.12
P0_12
  Top 0.25: U3.22 35.17,71.53 34.7,72 TP15.TP
P0_13
  Top 0.25: U4.3 67.75,68.55 67.7,68.5 66.9,68.5 TP24.TP
P0_14
  Top 0.25: U4.11 70.03,64.42 TP19.TP
P0_15
  Top 0.25: TP20.TP 70.2,63.9 70.67,64.38 U4.12
P0_16
  Top 0.25: U4.22 70.67,71.53 70.2,72 TP21.TP
P0_17
  Top 0.25: U5.3 67.75,45.75 67.7,45.7 66.9,45.7 TP30.TP
P0_18
  Top 0.25: U5.11 70.03,41.62 TP25.TP
P0_19
  Top 0.25: TP26.TP 70.2,41.1 70.67,41.58 U5.12
P0_20
  Top 0.25: U5.22 70.67,48.73 70.2,49.2 TP27.TP
P0_21
  Top 0.25: U6.3 67.75,22.95 67.7,22.9 66.9,22.9 TP36.TP
P0_22
  Top 0.25: U6.11 70.03,18.82 TP31.TP
P0_23
  Top 0.25: TP32.TP 70.2,18.3 70.67,18.77 U6.12
P0_24
  Top 0.25: U6.22 70.67,25.93 70.2,26.4 TP33.TP
P1_0  (via drill 0.3)
  Top 0.25: U1.35 34.95,24.25 v35,24.3
  Bottom 0.25: TP10.TP 34.1,26.2 35,25.3 v35,24.3
P1_1  (via drill 0.3)
  Top 0.25: U1.30 33.55,20.45 v33.4,20.3 | TP11.TP 32.3,18 v32.9,18.6
  Bottom 0.25: v33.4,20.3 33.4,19.1 v32.9,18.6
P1_2  (via drill 0.3)
  Top 0.25: U2.35 34.95,47.05 v35,47.1
  Bottom 0.25: TP5.TP 34.1,49 35,48.1 v35,47.1
P1_3  (via drill 0.3)
  Top 0.25: U2.30 33.55,43.25 v33.4,43.1 | TP6.TP 32.3,40.8 v32.9,41.4
  Bottom 0.25: v33.4,43.1 33.4,41.9 v32.9,41.4
P1_4  (via drill 0.3)
  Top 0.25: U3.35 34.95,69.85 v35,69.9
  Bottom 0.25: TP16.TP 34.1,71.8 35,70.9 v35,69.9
P1_5  (via drill 0.3)
  Top 0.25: U3.30 33.55,66.05 v33.4,65.9 | TP17.TP 32.3,63.6 v32.9,64.2
  Bottom 0.25: v33.4,65.9 33.4,64.7 v32.9,64.2
P1_6  (via drill 0.3)
  Top 0.25: U4.35 70.45,69.85 v70.5,69.9
  Bottom 0.25: TP22.TP 69.6,71.8 70.5,70.9 v70.5,69.9
P1_7  (via drill 0.3)
  Top 0.25: U4.30 69.05,66.05 v68.9,65.9 | TP23.TP 67.8,63.6 v68.4,64.2
  Bottom 0.25: v68.9,65.9 68.9,64.7 v68.4,64.2
P1_8  (via drill 0.3)
  Top 0.25: U5.35 70.45,47.05 v70.5,47.1
  Bottom 0.25: TP28.TP 69.6,49 70.5,48.1 v70.5,47.1
P1_9  (via drill 0.3)
  Top 0.25: U5.30 69.05,43.25 v68.9,43.1 | TP29.TP 67.8,40.8 v68.4,41.4
  Bottom 0.25: v68.9,43.1 68.9,41.9 v68.4,41.4
P1_10  (via drill 0.3)
  Top 0.25: U6.35 70.45,24.25 v70.5,24.3
  Bottom 0.25: TP34.TP 69.6,26.2 70.5,25.3 v70.5,24.3
P1_11  (via drill 0.3)
  Top 0.25: U6.30 69.05,20.45 v68.9,20.3 | TP35.TP 67.8,18 v68.4,18.6
  Bottom 0.25: v68.9,20.3 68.9,19.1 v68.4,18.6
RXD_MOSI  (via drill 0.3)
  Top 0.25: U1.24 33.88,25.82 33.3,26.4 22.5,26.4 v19.4,23.3 v14.7,23.3 | IC1.5 25.82,18.07 25.8,18.1 25.8,19.4 24.7,20.5 v24.7,22.3
  Bottom 0.25: v19.4,23.3 20.4,22.3 v24.7,22.3
  Bottom 0.4: v14.7,23.3 14,23.3
  Bottom 0.8: C100.3_MOSI 14,23.3
RXD_MOSI1  (via drill 0.3)
  Top 0.25: U2.24 33.88,48.62 33.3,49.2 22.5,49.2 v19.4,46.1 v14.7,46.1 | IC2.5 25.82,40.88 25.8,40.9 25.8,42.2 24.7,43.3 v24.7,45.1
  Bottom 0.25: v19.4,46.1 20.4,45.1 v24.7,45.1
  Bottom 0.4: v14.7,46.1 14,46.1
  Bottom 0.8: C3.3_MOSI 14,46.1
RXD_MOSI2  (via drill 0.3)
  Top 0.25: U3.24 33.88,71.42 33.3,72 22.5,72 v19.4,68.9 v14.7,68.9 | IC3.5 25.82,63.67 25.8,63.7 25.8,65 24.7,66.1 v24.7,67.9
  Bottom 0.25: v19.4,68.9 20.4,67.9 v24.7,67.9
  Bottom 0.4: v14.7,68.9 14,68.9
  Bottom 0.8: C6.3_MOSI 14,68.9
RXD_MOSI3  (via drill 0.3)
  Top 0.25: U4.24 69.38,71.42 68.8,72 58,72 v54.9,68.9 v50.2,68.9 | IC4.5 61.33,63.67 61.3,63.7 61.3,65 60.2,66.1 v60.2,67.9
  Bottom 0.25: v54.9,68.9 55.9,67.9 v60.2,67.9
  Bottom 0.4: v50.2,68.9 49.5,68.9
  Bottom 0.8: C9.3_MOSI 49.5,68.9
RXD_MOSI4  (via drill 0.3)
  Top 0.25: U5.24 69.38,48.62 68.8,49.2 58,49.2 v54.9,46.1 v50.2,46.1 | IC5.5 61.33,40.88 61.3,40.9 61.3,42.2 60.2,43.3 v60.2,45.1
  Bottom 0.25: v54.9,46.1 55.9,45.1 v60.2,45.1
  Bottom 0.4: v50.2,46.1 49.5,46.1
  Bottom 0.8: C12.3_MOSI 49.5,46.1
RXD_MOSI5  (via drill 0.3)
  Top 0.25: U6.24 69.38,25.82 68.8,26.4 58,26.4 v54.9,23.3 v50.2,23.3 | IC6.5 61.33,18.07 61.3,18.1 61.3,19.4 60.2,20.5 v60.2,22.3
  Bottom 0.25: v54.9,23.3 55.9,22.3 v60.2,22.3
  Bottom 0.4: v50.2,23.3 49.5,23.3
  Bottom 0.8: C15.3_MOSI 49.5,23.3
SCK  (via drill 0.3, 0.3 pad 0.6)
  Top 0.25: U1.1 33.35,24.25 v33.4,24.3 | v14.7,21.1 18.5,21.1 v21.4,24 23.3,25.9 29.2,25.9 v30,25.1 | IC1.6 26.48,18.02 26.4,18.1 26.4,20 25.7,20.7 v25.7,22.9
  Bottom 0.25: v33.4,24.3 32.9,24.3 32,23.4 30.1,23.4 29.7,23.8 29.7,24.8 v30,25.1 | v25.7,22.9 22.5,22.9 v21.4,24
  Bottom 0.4: v14.7,21.1 14,21.1
  Bottom 0.8: C100.5_CLK 14,21.1
SCK1  (via drill 0.3, 0.3 pad 0.6)
  Top 0.25: U2.1 33.35,47.05 v33.4,47.1 | v14.7,43.9 18.5,43.9 v21.4,46.8 23.3,48.7 29.2,48.7 v30,47.9 | IC2.6 26.48,40.83 26.4,40.9 26.4,42.8 25.7,43.5 v25.7,45.7
  Bottom 0.25: v33.4,47.1 32.9,47.1 32,46.2 30.1,46.2 29.7,46.6 29.7,47.6 v30,47.9 | v25.7,45.7 22.5,45.7 v21.4,46.8
  Bottom 0.4: v14.7,43.9 14,43.9
  Bottom 0.8: C3.5_CLK 14,43.9
SCK2  (via drill 0.3, 0.3 pad 0.6)
  Top 0.25: U3.1 33.35,69.85 v33.4,69.9 | v14.7,66.7 18.5,66.7 v21.4,69.6 23.3,71.5 29.2,71.5 v30,70.7 | IC3.6 26.48,63.62 26.4,63.7 26.4,65.6 25.7,66.3 v25.7,68.5
  Bottom 0.25: v33.4,69.9 32.9,69.9 32,69 30.1,69 29.7,69.4 29.7,70.4 v30,70.7 | v25.7,68.5 22.5,68.5 v21.4,69.6
  Bottom 0.4: v14.7,66.7 14,66.7
  Bottom 0.8: C6.5_CLK 14,66.7
SCK3  (via drill 0.3, 0.3 pad 0.6)
  Top 0.25: U4.1 68.85,69.85 v68.9,69.9 | v50.2,66.7 54,66.7 v56.9,69.6 58.8,71.5 64.7,71.5 v65.5,70.7 | IC4.6 61.98,63.62 61.9,63.7 61.9,65.6 61.2,66.3 v61.2,68.5
  Bottom 0.25: v68.9,69.9 68.4,69.9 67.5,69 65.6,69 65.2,69.4 65.2,70.4 v65.5,70.7 | v61.2,68.5 58,68.5 v56.9,69.6
  Bottom 0.4: v50.2,66.7 49.5,66.7
  Bottom 0.8: C9.5_CLK 49.5,66.7
SCK4  (via drill 0.3, 0.3 pad 0.6)
  Top 0.25: U5.1 68.85,47.05 v68.9,47.1 | v50.2,43.9 54,43.9 v56.9,46.8 58.8,48.7 64.7,48.7 v65.5,47.9 | IC5.6 61.98,40.83 61.9,40.9 61.9,42.8 61.2,43.5 v61.2,45.7
  Bottom 0.25: v68.9,47.1 68.4,47.1 67.5,46.2 65.6,46.2 65.2,46.6 65.2,47.6 v65.5,47.9 | v61.2,45.7 58,45.7 v56.9,46.8
  Bottom 0.4: v50.2,43.9 49.5,43.9
  Bottom 0.8: C12.5_CLK 49.5,43.9
SCK5  (via drill 0.3, 0.3 pad 0.6)
  Top 0.25: U6.1 68.85,24.25 v68.9,24.3 | v50.2,21.1 54,21.1 v56.9,24 58.8,25.9 64.7,25.9 v65.5,25.1 | IC6.6 61.98,18.02 61.9,18.1 61.9,20 61.2,20.7 v61.2,22.9
  Bottom 0.25: v68.9,24.3 68.4,24.3 67.5,23.4 65.6,23.4 65.2,23.8 65.2,24.8 v65.5,25.1 | v61.2,22.9 58,22.9 v56.9,24
  Bottom 0.4: v50.2,21.1 49.5,21.1
  Bottom 0.8: C15.5_CLK 49.5,21.1
SWCLK  (via drill 0.3 pad 0.6)
  Top 0.25: U1.4 v32,22.3 | CON1.4 30.23,13.94 30.4,14.1 v30.4,20.1
  Bottom 0.25: v30.4,20.1 31.4,20.1 32.1,20.8 32.1,22.2 v32,22.3
SWCLK1  (via drill 0.3 pad 0.6)
  Top 0.25: U2.4 v32,45.1 | CON2.4 30.23,36.73 30.4,36.9 v30.4,42.9
  Bottom 0.25: v30.4,42.9 31.4,42.9 32.1,43.6 32.1,45 v32,45.1
SWCLK2  (via drill 0.3 pad 0.6)
  Top 0.25: U3.4 v32,67.9 | CON3.4 30.23,59.53 30.4,59.7 v30.4,65.7
  Bottom 0.25: v30.4,65.7 31.4,65.7 32.1,66.4 32.1,67.8 v32,67.9
SWCLK3  (via drill 0.3 pad 0.6)
  Top 0.25: U4.4 v67.5,67.9 | CON4.4 65.73,59.53 65.9,59.7 v65.9,65.7
  Bottom 0.25: v65.9,65.7 66.9,65.7 67.6,66.4 67.6,67.8 v67.5,67.9
SWCLK4  (via drill 0.3 pad 0.6)
  Top 0.25: U5.4 v67.5,45.1 | CON5.4 65.73,36.73 65.9,36.9 v65.9,42.9
  Bottom 0.25: v65.9,42.9 66.9,42.9 67.6,43.6 67.6,45 v67.5,45.1
SWCLK5  (via drill 0.3 pad 0.6)
  Top 0.25: U6.4 v67.5,22.3 | CON6.4 65.73,13.94 65.9,14.1 v65.9,20.1
  Bottom 0.25: v65.9,20.1 66.9,20.1 67.6,20.8 67.6,22.2 v67.5,22.3
SWDIO
  Top 0.25: U1.5 31.65,21.65 31.5,21.8 30.7,21.8 29.8,20.9 29.8,14.8 CON1.2
SWDIO1
  Top 0.25: U2.5 31.65,44.45 31.5,44.6 30.7,44.6 29.8,43.7 29.8,37.6 CON2.2
SWDIO2
  Top 0.25: U3.5 31.65,67.25 31.5,67.4 30.7,67.4 29.8,66.5 29.8,60.4 CON3.2
SWDIO3
  Top 0.25: U4.5 67.15,67.25 67,67.4 66.2,67.4 65.3,66.5 65.3,60.4 CON4.2
SWDIO4
  Top 0.25: U5.5 67.15,44.45 67,44.6 66.2,44.6 65.3,43.7 65.3,37.6 CON5.2
SWDIO5
  Top 0.25: U6.5 67.15,21.65 67,21.8 66.2,21.8 65.3,20.9 65.3,14.8 CON6.2
VPP  (via drill 0.3)
  Top 0.25: U1.31 34.85,20.45 v35,20.3
  Bottom 0.25: v35,20.3 35,19.4 33.2,17.6 28.6,17.6 28.4,17.8 14.7,17.8
  Bottom 0.4: 14,17.8 14.7,17.8
  Bottom 0.8: C100.8_DAT1 14,17.8
VPP1  (via drill 0.3)
  Top 0.25: U2.31 34.85,43.25 v35,43.1
  Bottom 0.25: v35,43.1 35,42.2 33.2,40.4 28.6,40.4 28.4,40.6 14.7,40.6
  Bottom 0.4: 14,40.6 14.7,40.6
  Bottom 0.8: C3.8_DAT1 14,40.6
VPP2  (via drill 0.3)
  Top 0.25: U3.31 34.85,66.05 v35,65.9
  Bottom 0.25: v35,65.9 35,65 33.2,63.2 28.6,63.2 28.4,63.4 14.7,63.4
  Bottom 0.4: 14,63.4 14.7,63.4
  Bottom 0.8: C6.8_DAT1 14,63.4
VPP3  (via drill 0.3)
  Top 0.25: U4.31 70.35,66.05 v70.5,65.9
  Bottom 0.25: v70.5,65.9 70.5,65 68.7,63.2 64.1,63.2 63.9,63.4 50.2,63.4
  Bottom 0.4: 49.5,63.4 50.2,63.4
  Bottom 0.8: C9.8_DAT1 49.5,63.4
VPP4  (via drill 0.3)
  Top 0.25: U5.31 70.35,43.25 v70.5,43.1
  Bottom 0.25: v70.5,43.1 70.5,42.2 68.7,40.4 64.1,40.4 63.9,40.6 50.2,40.6
  Bottom 0.4: 49.5,40.6 50.2,40.6
  Bottom 0.8: C12.8_DAT1 49.5,40.6
VPP5  (via drill 0.3)
  Top 0.25: U6.31 70.35,20.45 v70.5,20.3
  Bottom 0.25: v70.5,20.3 70.5,19.4 68.7,17.6 64.1,17.6 63.9,17.8 50.2,17.8
  Bottom 0.4: 49.5,17.8 50.2,17.8
  Bottom 0.8: C15.8_DAT1 49.5,17.8

## Text on the board
Bottom: @_K4ZUKI_ | @_K4ZUKI_ | @_K4ZUKI_ | @_K4ZUKI_ | @_K4ZUKI_ | @_K4ZUKI_
tPlace: LBCA2HNZYZ-uSD | LBCA2HNZYZ-uSD | r03 | r03 | CC-BY-SA / Licensed | CC-BY-SA / Licensed | LBCA2HNZYZ-uSD | LBCA2HNZYZ-uSD | r03 | r03 | CC-BY-SA / Licensed | CC-BY-SA / Licensed | LBCA2HNZYZ-uSD | LBCA2HNZYZ-uSD | r03 | r03 | CC-BY-SA / Licensed | CC-BY-SA / Licensed
tNames: board thickness t=0.6mm
_tNames: U1 | U1 | R1 | R1 | IC1 | IC1 | C2 | C1 | C2 | C1 | U1 | U1 | R1 | R1 | IC1 | IC1 | C2 | C1 | C2 | C1 | U1 | U1 | R1 | R1 | IC1 | IC1 | C2 | C1 | C2 | C1